# Altium PCB BOARD.PcbDoc
Units mm, origin at the board's own origin, x right, y up, seen from the top; angles counter-clockwise.
Board outline 30 x 20 mm, 2 copper layers (Top Layer, Bottom Layer), stack 1.18 mm thick; 35 components, 39 nets, 158 pads, 60 vias.
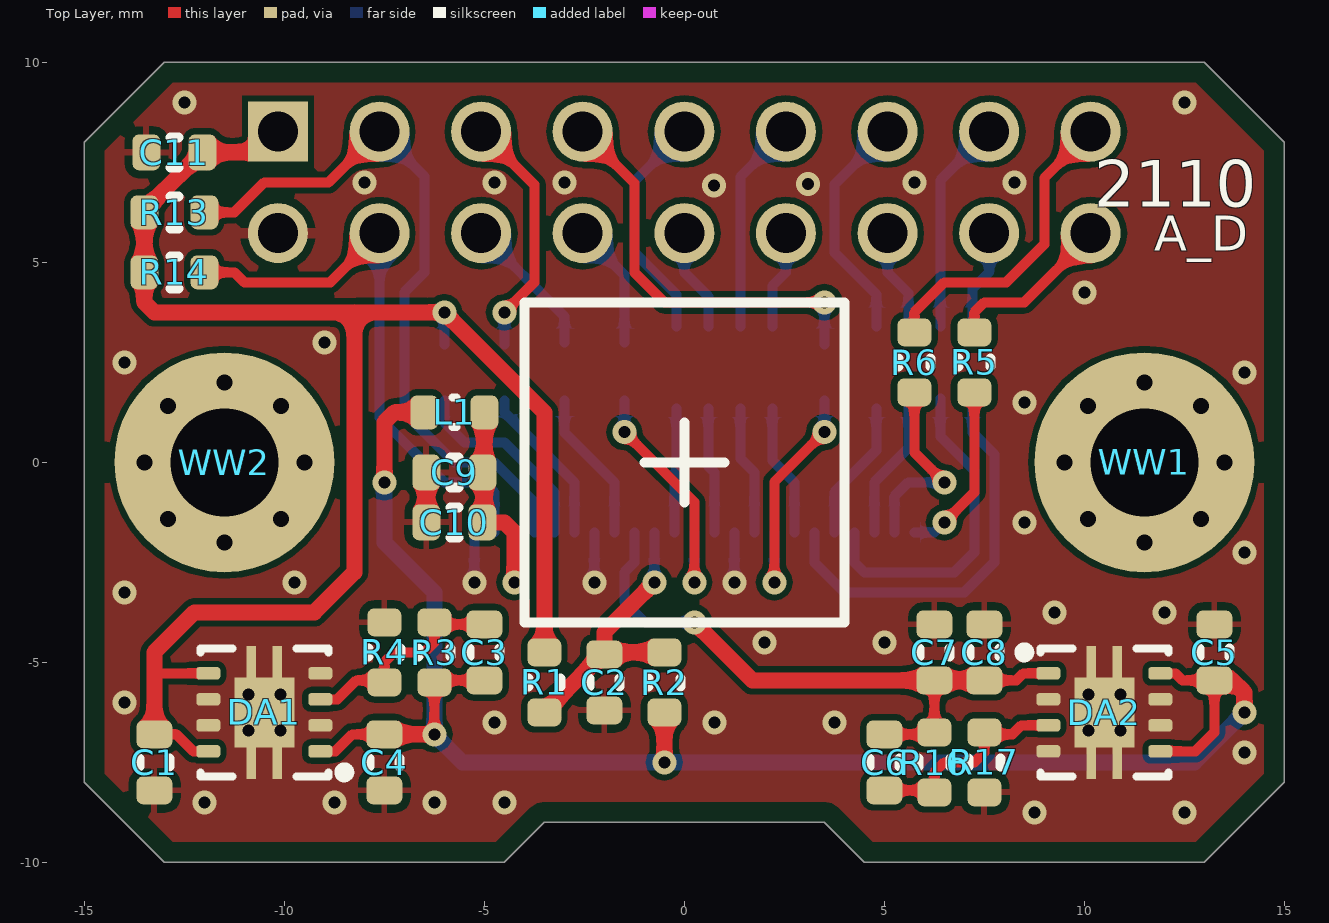
[diagram p0: Top Layer view]
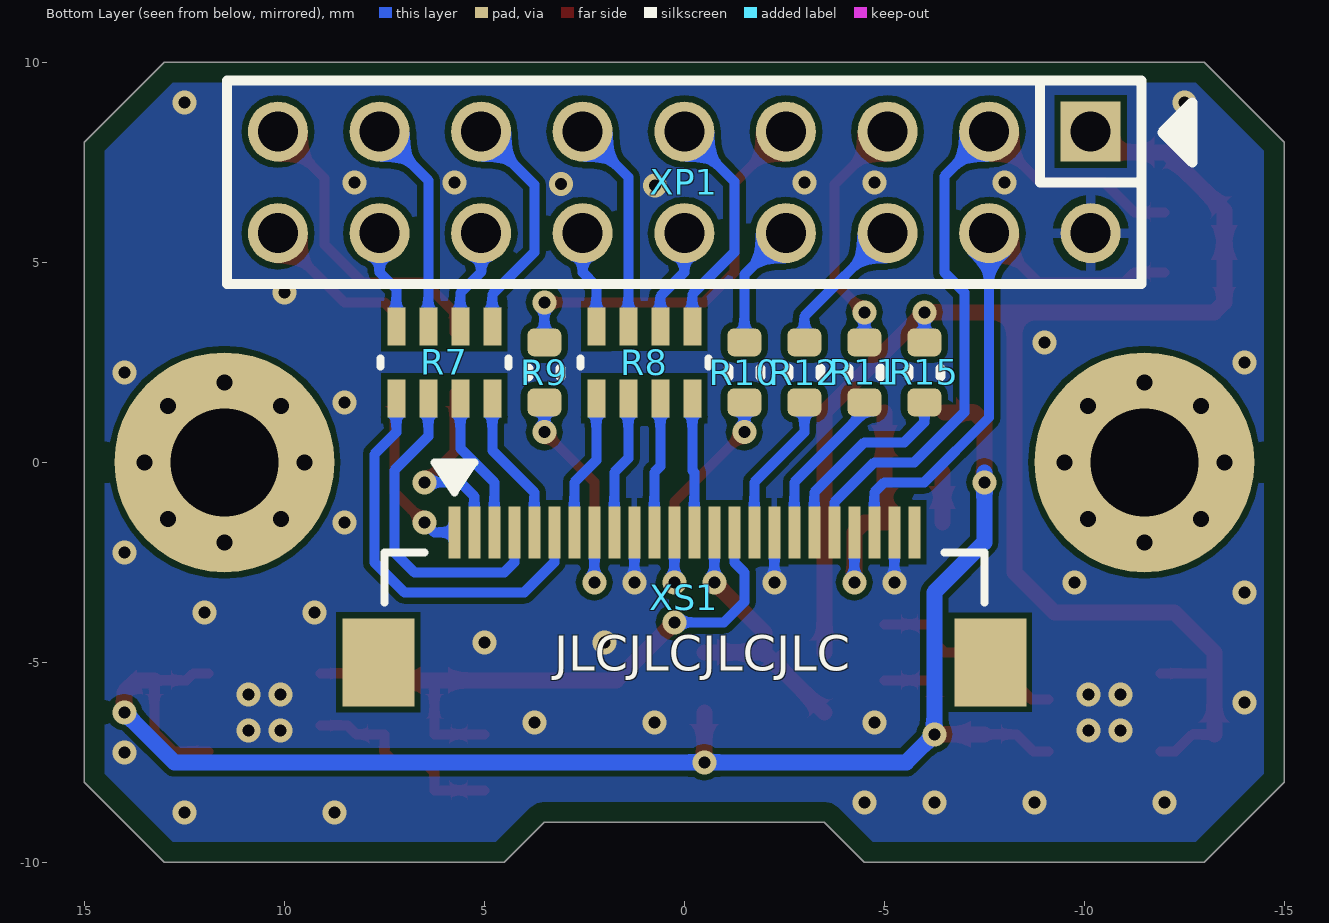
[diagram p1: Bottom Layer view, seen from below]

## Layer stack, top to bottom
Top Solder: solder mask 0.01, Solder Resist, Dk 3.5
Top Layer: signal copper 0.03
Dielectric1: core 1.12, FR-4, Dk 4.2
Bottom Layer: signal copper 0.03
Bottom Solder: solder mask 0.01, Solder Resist, Dk 3.5

## Board outline
-15,-8 -13,-10 -4.5,-10 -3.5,-9 3.5,-9 4.5,-10 13,-10 15,-8 15,8 13,10 -13,10 -15,8

## Design rules (kind name [scope] priority, off if disabled: settings)
BoardOutlineClearance [All] p1: gap=0.5 ignorepadtopadclearanceinfootprint=FALSE
Clearance [All] p1: gap=0.152 ignorepadtopadclearanceinfootprint=FALSE
ComponentClearance [All] p1 off: gap=0.25 collisioncheckmode=3 verticalgap=0.25 showdistances=FALSE
DiffPairsRouting [All] p1: maxlimit=0.4 minlimit=0.15 mostfreqgap=0.25 toplayer_minwidth=0.2 toplayer_maxwidth=0.4 toplayer_prefwidth=0.25 bottomlayer_minwidth=0.2 bottomlayer_maxwidth=0.4 bottomlayer_prefwidth=0.25 maxuncoupledlength=12
Height [All] p1: minheight=0 maxheight=25 prefheight=25
HoleSize [All] p1: absolutevalues=TRUE maxlimit=6 minlimit=0.3 maxpercent=80.000 minpercent=20.000
HoleToHoleClearance [All] p1: gap=0.25 allowstackedmicrovias=TRUE
MinimumSolderMaskSliver [All] p1 off: minsoldermaskwidth=0.254
PlaneClearance [All] p1: clearance=0.5
PlaneConnect [All] p1: planeconnectstyle=Relief reliefexpansion=0.5 reliefentries=4 reliefconductorwidth=0.25 reliefairgap=0.25
PolygonConnect PolygonConnect_DirectConnect [InComponentClass('DirectConnect')] p1: connectstyle=Direct reliefconductorwidth=0.254 reliefentries=4 polygonreliefangle="90 Angle" airgapwidth=0.254
PolygonConnect [All] p2: thpad.connectstyle=Relief thpad.reliefconductorwidth=0.25 thpad.reliefentries=4 thpad.polygonreliefangle="90 Angle" thpad.airgapwidth=0.2 smdpad.connectstyle=Relief smdpad.reliefconductorwidth=0.15 smdpad.reliefentries=4 smdpad.polygonreliefangle="90 Angle" smdpad.airgapwidth=0.2 via.connectstyle=Direct via.reliefconductorwidth=0.254 via.reliefentries=4 via.polygonreliefangle="90 Angle" via.airgapwidth=0.254
RoutingCorners [All] p1: cornerstyle=45-Degree minsetback=1.5 maxsetback=3.5
RoutingVias [All] p1: holewidth=0.6 width=1.2 viastyle="Through Hole" minholewidth=0.3 minwidth=0.6 maxholewidth=1 maxwidth=2
SMDEntry [All] p1: side=TRUE corner=TRUE anyangle=TRUE
SilkToSilkClearance [All] p1 off: silktosilkclearance=0.254
SilkToSolderMaskClearance [IsPad] p1 off: minsilkscreentomaskgap=0.254 clearancetoexposedcopper=TRUE
SolderMaskExpansion [All] p1: expansion=0.05 istentingtop=FALSE
Width [All] p1: maxlimit=8 minlimit=0.2 preferedwidth=0.6
Width Width_TrackEnds [All] p2 off: maxlimit=0.25 minlimit=0.25 preferedwidth=0.25 checkconnectedcopper=TRUE
19 further rules are at their usual default settings.

## Classes and differential pairs
component class DirectConnect: DA1 DA2

## Components (designator, comment, footprint, x,y, rotation, side; value= is the part's Value field where it differs from the comment)
C1 "Capacitor" C0603_160X080H080_H -13.25,-7.5 r90 top value=1uF
C2 "Capacitor" C0603_160X080H080_H -2,-5.5 r90 top value=1uF
C3 "Capacitor" C0603_160X080H080_H -5,-4.75 r270 top value=27pF
C4 "Capacitor" C0603_160X080H080_H -7.5,-7.5 r90 top value=10uF
C5 "Capacitor" C0603_160X080H080_H 13.25,-4.75 r270 top value=1uF
C6 "Capacitor" C0603_160X080H080_H 5,-7.5 r90 top value=27pF
C7 "Capacitor" C0603_160X080H080_H 6.25,-4.75 r270 top value=10uF
C8 "Capacitor" C0603_160X080H080_H 7.5,-4.75 r270 top value=0.1uF
C9 "Capacitor" C0603_160X080H080_H -5.75,-0.25 r0 top value=1uF
C10 "Capacitor" C0603_160X080H080_H -5.75,-1.5 r0 top value=0.1uF
C11 "Capacitor" C0603_160X080H080_H -12.75,7.75 r0 top value=10uF
DA1 "TPS73501DRB" VSON-8_065P300X300X100_N -10.5,-6.25 r90 top value=TPS73501DRBR
DA2 "TPS73501DRB" VSON-8_065P300X300X100_N 10.5,-6.25 r270 top value=TPS73501DRBR
L1 "FerriteBead" L0603_160X080H080_H -5.75,1.25 r0 top value=BLM18PG221SH1D
R1 "Resistor" R0603_160X080H045_H -3.5,-5.5 r90 top value=0
R2 "Resistor" R0603_160X080H045_H -0.5,-5.5 r270 top value=0
R3 "Resistor" R0603_160X080H045_H -6.25,-4.75 r90 top value=27k
R4 "Resistor" R0603_160X080H045_H -7.5,-4.75 r270 top value=20k
R5 "Resistor" R0603_160X080H045_H 7.25,2.5 r90 top value=51
R6 "Resistor" R0603_160X080H045_H 5.75,2.5 r90 top value=51
R7 "Resistor-4" CAT16-x4 6,2.5 r180 bottom value=51
R8 "Resistor-4" CAT16-x4 1,2.5 r180 bottom value=51
R9 "Resistor" R0603_160X080H045_H 3.5,2.25 r90 bottom value=51
R10 "Resistor" R0603_160X080H045_H -1.5,2.25 r90 bottom value=51
R11 "Resistor" R0603_160X080H045_H -4.5,2.25 r90 bottom value=51
R12 "Resistor" R0603_160X080H045_H -3,2.25 r90 bottom value=51
R13 "Resistor" R0603_160X080H045_H -12.75,6.25 r180 top value=4.7k
R14 "Resistor" R0603_160X080H045_H -12.75,4.75 r180 top value=4.7k
R15 "Resistor" R0603_160X080H045_H -6,2.25 r90 bottom value=4.7k
R16 "Resistor" R0603_160X080H045_H 6.25,-7.5 r90 top value=27k
R17 "Resistor" R0603_160X080H045_H 7.5,-7.5 r90 top value=360k
WW1 "NoBody" MH_M2.5 11.5,0 r180 top locked value=MOUNTINGHOLE
WW2 "NoBody" MH_M2.5 -11.5,0 r180 top locked value=MOUNTINGHOLE
XP1 "Text" PLD-18 0,7 r0 bottom locked value=PLD-18
XS1 "OV7670" FH12-24S-0.5SH 0,-5 r180 bottom locked value=FH12-24S-0.5SH(55)

## Footprints (in the part's own frame and the unit in brackets; to place one, negate y for a bottom-side part, rotate by r counter-clockwise, add the part's x,y. Pads: shape width x height; smd on the part's side, far side on the other; paste and mask are expansions set on the pad)
C0603_160X080H080_H [mm] "Chip Capacitor, 2-Leads, Body 1,60x0,80mm, IPC High Density"
  rrect50% 0.7x0.9 smd: 1(-0.7,0) 2(0.7,0)
  silkscreen extent -0.1,-0.38 0.1,0.38, body extent -0.8,-0.4 0.8,0.4, height 0.8
CAT16-x4 [mm] "Chip Array, Concave, 8-Leads, Pitch 0,80mm,  Body 3,20x1,60mm,  IPC Medium Density"
  rect 0.45x0.95 smd: 1(-1.2,-0.9) 2(-0.4,-0.9) 3(0.4,-0.9) 4(1.2,-0.9) 5(1.2,0.9) 6(0.4,0.9) 7(-0.4,0.9) 8(-1.2,0.9)
  silkscreen extent -1.6,-0.1 1.6,0.1, body extent -1.7,-0.95 1.7,0.95, height 0.6
FH12-24S-0.5SH [mm]
  rect 1.8x2.2 smd mask+0.025: 0(-7.65,0) 0(7.65,0)
  rect 0.3x1.3 smd mask+0.025: 1(-5.75,3.25) 2(-5.25,3.25) 3(-4.75,3.25) 4(-4.25,3.25) 5(-3.75,3.25) 6(-3.25,3.25) 7(-2.75,3.25) 8(-2.25,3.25) 9(-1.75,3.25) 10(-1.25,3.25) 11(-0.75,3.25) 12(-0.25,3.25) 13(0.25,3.25) 14(0.75,3.25) 15(1.25,3.25) 16(1.75,3.25) 17(2.25,3.25) 18(2.75,3.25) 19(3.25,3.25) 20(3.75,3.25) 21(4.25,3.25) 22(4.75,3.25) 23(5.25,3.25) 24(5.75,3.25)
  silkscreen extent -7.5,1.5 7.5,5, body extent -8.05,-2.9 8.05,3.5, height 2.09
L0603_160X080H080_H [mm] "Chip Inductor, 2-Leads, Body 1,60x0,80mm, IPC High Density"
  rrect50% 0.7x0.85 smd: 1(-0.75,0) 2(0.75,0)
  silkscreen extent -0.05,-0.37 0.05,0.37, body extent -0.8,-0.4 0.8,0.4, height 0.8
MH_M2.5 [mm] "Mounting hole M2,5"
  round 0.4 hole 0.4 paste-10: MH(-2,0) MH(-1.414,1.414) MH(-1.414,-1.414) MH(0,2) MH(0,-2) MH(1.414,1.414) MH(1.414,-1.414) MH(2,0)
  round 5.5 hole 2.7 paste-10: MH(0,0)
PLD-18 [mm]
  rect 1.5x1.5 hole 1: 1(-10.16,-1.27)
  round 1.5 hole 1: 2(-10.16,1.27) 3(-7.62,-1.27) 4(-7.62,1.27) 5(-5.08,-1.27) 6(-5.08,1.27) 7(-2.54,-1.27) 8(-2.54,1.27) 9(0,-1.27) 10(0,1.27) 11(2.54,-1.27) 12(2.54,1.27) 13(5.08,-1.27) 14(5.08,1.27) 15(7.62,-1.27) 16(7.62,1.27) 17(10.16,-1.27) 18(10.16,1.27)
  silkscreen extent -11.43,-2.54 11.43,2.54, body extent -11.43,-2.54 11.43,2.54, height 8.9
R0603_160X080H045_H [mm] "Chip Resistor, 2-Leads, Body 1,60x0,80mm, IPC High Density"
  rrect50% 0.7x0.85 smd: 1(-0.75,0) 2(0.75,0)
  silkscreen extent -0.1,-0.4 0.1,0.4, body extent -0.8,-0.4 0.8,0.4, height 0.45
VSON-8_065P300X300X100_N [mm]
  rrect50% 0.31x0.6 smd: 1(-0.975,-1.4) 2(-0.325,-1.4) 3(0.325,-1.4) 4(0.975,-1.4) 5(0.975,1.4) 6(0.325,1.4) 7(-0.325,1.4) 8(-0.975,1.4)
  rect 0.825x0.23 smd: TP(-1.25,-0.325) TP(-1.25,0.325) TP(1.25,-0.325) TP(1.25,0.325)
  rect 1.75x1.5 smd: TP(0,0)
  silkscreen extent -1.62,-2.13 1.6,1.6, body extent -1.52,-1.52 1.52,1.52, height 1.04

## Part data
C1 C2 C5 C9: library part GCM188R71E105KA64D, Dielectric Type=X7R, Manufacturer=Murata, Schematic Value="1uF, 25V, X7R", Tolerance=±10%, Voltage=25V, Working Temperature Max=+125°С, Working Temperature Min=-55°С, Application Category=1, Functional Analog=GCM188R71E105KA64J, ID=134, Part Number=GCM188R71E105KA64D, Published=18.05.2010, Publisher="Andrew Danich", Type=Конденсатор
C3 C6: library part GRM1885C1H270JA01D, Dielectric Type=NP0, Manufacturer=Murata, Schematic Value="27pF, 50V, NP0", Tolerance=±5%, Voltage=50V, Working Temperature Max=+125°С, Working Temperature Min=-55°С, Application Category=1, Functional Analog=GRM1885C1H270JA01J, ID=213, Part Number=GRM1885C1H270JA01D, Published=18.05.2010, Publisher="Andrew Danich", Type=Конденсатор
C4 C7 C11: library part GRM188R60J106ME47D, Dielectric Type=X5R, Manufacturer=Murata, Schematic Value="10uF, 6.3V, X5R", Tolerance=±20%, Voltage=6.3V, Working Temperature Max=+85°С, Working Temperature Min=-55°С, Application Category=1, Functional Analog=GRM188R60J106ME47J, ID=136, Part Number=GRM188R60J106ME47D, Published=18.05.2010, Publisher="Andrew Danich", Type=Конденсатор
C8 C10: library part GRM188R72A104KA35D, Dielectric Type=X7R, Manufacturer=Murata, Schematic Value="0.1uF, 100V, X7R", Tolerance=±10%, Voltage=100V, Working Temperature Max=+125°С, Working Temperature Min=-55°С, Application Category=1, Functional Analog=GRM188R72A104KA35J, ID=232, Part Number=GRM188R72A104KA35D, Published=18.05.2010, Publisher="Andrew Danich", Type=Конденсатор
DA1 DA2: library part TPS73501DRBR, Input Voltage=+2.2…5.5V, Manufacturer="Texas Instruments", Output Current=500mA, Output Voltage=+1.2…5.5V, Working Temperature Max=+125°С, Working Temperature Min=-40°С, Application Category=1, ClassName=DirectConnect, Functional Analog=TPS73501DRBT, ID=27, Part Number=TPS73501DRBR, Published=25.03.2019, Publisher="Andrew Danich", RMS Noise=13.2uV, Type=Микросхема
L1: library part BLM18PG221SH1D, DC Resistance=0.1ohm, Inductor Type=EMIFIL, Manufacturer=Murata, Rated Current=1.4A, Schematic Value="220ohm ±25%", Tolerance=±25%, Working Temperature Max=+125°С, Working Temperature Min=-55°С, Application Category=1, Functional Analog=BLM18PG221SH1B, ID=8, Impedance at 100Mhz=220ohm, Part Number=BLM18PG221SH1D, Published=14.11.2014, Publisher="Andrew Danich", Type=Дроссель
R1 R2: library part RC0603JR-070R, Limit Voltage=50V, Manufacturer=Yageo, Schematic Value="0 ±5%", Temperature Coefficient=100ppm, Tolerance=±5%, Total Power Dissipation=0.1W, Working Temperature Max=+155°С, Working Temperature Min=-55°С, Application Category=1, Functional Analog="RC0603FR-070RL, CR0603-J/-000E", ID=5, Part Number=RC0603JR-070R, Published=24.03.2010, Publisher="Andrew Danich", Series Type=Thick-Film, Type=Резистор
R3 R16: library part RC0603JR-0727KL, Limit Voltage=50V, Manufacturer=Yageo, Schematic Value="27k ±5%", Temperature Coefficient=100ppm, Tolerance=±5%, Total Power Dissipation=0.1W, Working Temperature Max=+155°С, Working Temperature Min=-55°С, Application Category=1, ID=38, Part Number=RC0603JR-0727KL, Published=24.03.2010, Publisher="Andrew Danich", Series Type=Thick-Film, Type=Резистор
R4: library part RC0603FR-0720KL, Limit Voltage=50V, Manufacturer=Yageo, Schematic Value="20k ±1%", Temperature Coefficient=100ppm, Tolerance=±1%, Total Power Dissipation=0.1W, Working Temperature Max=+155°С, Working Temperature Min=-55°С, Application Category=1, ID=259, Part Number=RC0603FR-0720KL, Published=24.03.2010, Publisher="Andrew Danich", Series Type=Thick-Film, Type=Резистор
R5 R6 R9 R10 R11 R12: library part RC0603JR-0751RL, Limit Voltage=50V, Manufacturer=Yageo, Schematic Value="51 ±5%", Temperature Coefficient=100ppm, Tolerance=±5%, Total Power Dissipation=0.1W, Working Temperature Max=+155°С, Working Temperature Min=-55°С, Application Category=1, Functional Analog=CR0603-JW-510E, ID=314, Part Number=RC0603JR-0751RL, Published=24.03.2010, Publisher="Andrew Danich", Series Type=Thick-Film, Type=Резистор
R7 R8: library part CAT16-510J4LF, Limit Voltage=50V, Manufacturer=Bourns, Schematic Value="51 ±5%", Temperature Coefficient=200ppm, Tolerance=±5%, Total Power Dissipation=0,062W, Working Temperature Max=+125°С, Working Temperature Min=-55°С, Application Category=1, Functional Analog=TC164-JR-0751RL, ID=21, Part Number=CAT16-510J4LF, Published=15.07.2014, Publisher="Andrew Danich", Series Type=Thick-Film, Type="Набор резисторов"
R13 R14 R15: library part RC0603JR-074K7L, Limit Voltage=50V, Manufacturer=Yageo, Schematic Value="4.7k ±5%", Temperature Coefficient=100ppm, Tolerance=±5%, Total Power Dissipation=0.1W, Working Temperature Max=+155°С, Working Temperature Min=-55°С, Application Category=1, ID=56, Part Number=RC0603JR-074K7L, Published=24.03.2010, Publisher="Andrew Danich", Series Type=Thick-Film, Type=Резистор
R17: library part RC0603JR-07360KL, Limit Voltage=50V, Manufacturer=Yageo, Schematic Value="360k ±5%", Temperature Coefficient=100ppm, Tolerance=±5%, Total Power Dissipation=0.1W, Working Temperature Max=+155°С, Working Temperature Min=-55°С, Application Category=1, ID=48, Part Number=RC0603JR-07360KL, Published=24.03.2010, Publisher="Andrew Danich", Series Type=Thick-Film, Type=Резистор
WW1 WW2: library part MOUNTINGHOLE, ID=1, Part Number=MOUNTINGHOLE, Published=24.03.2015, Publisher="Andrew Danich", Type=Лепесток
XP1: library part PLD-18, Limit Current=3A, Limit Voltage=250V, Resistance=15momh, Application Category=1, Connector Type=Male, ID=121, Part Number=PLD-18, Pins=18, Pitch=2.54mm, Published=03.09.2018, Publisher="Andrew Danich", Surface Finish=Gold, Type=Вилка
XS1: library part FH12-24S-0.5SH(55), Limit Current=500mA, Limit Voltage=50V, Manufacturer="Hirose Connector", Application Category=1, Connector Type=Female, ID=4, Part Number=FH12-24S-0.5SH(55), Pins=24, Pitch=0.5mm, Published=09.02.2019, Publisher="Andrew Danich", Series=FFC, Type=Розетка

## Via types
v1: diameter 0.6, hole 0.3, Top Layer to Bottom Layer, tented both sides, 52 vias
v2: diameter 0.6, hole 0.3, Top Layer to Bottom Layer, 8 vias

## Nets (pads, with @x,y where several pads share a name; then routed paths per layer and width w, separated by ;. In a path a pad name is that pad's centre, name@x,y a point inside that pad or via, vN(x,y) a via of type N, cw(c..) or ccw(c..) an arc to the next point about the centre after c; other vN are vias at no path point)
AVCC2P8: C9.2 C10.2 L1.2 XS1.21 | length 6.2
  Top Layer w0.4: L1.2 -5,-1.45 C10.2 -4.5,-1.5 -4.25,-1.75 v1(-4.25,-3)
  Bottom Layer w0.25: v1(-4.25,-3) XS1.21
DATA0: R5.2 XP1.18 | length 4.3
  Top Layer w0.25: R5.2 7.25,3.75 7.5,4 8.5,4 10.16,5.66 XP1.18
DATA1: R6.2 XP1.17 | length 7.8
  Top Layer w0.25: R6.2 5.75,3.75 6.5,4.5 8.05,4.5 9,5.45 9,7.11 XP1.17
DATA2: R7.8 XP1.16 | length 2.5
  Bottom Layer w0.25: R7.8 7.2,4.33 7.62,4.75 XP1.16
DATA3: R7.7 XP1.15 | length 5.4
  Bottom Layer w0.25: R7.7 6.4,7.05 XP1.15
DATA4: R7.6 XP1.14 | length 2.5
  Bottom Layer w0.25: XP1.14 5.08,4.75 5.6,4.23 R7.6
DATA5: R7.5 XP1.13 | length 5.9
  Bottom Layer w0.25: R7.5 4.8,4.2 3.75,5.25 3.75,6.94 XP1.13
DATA6: R8.8 XP1.12 | length 2.5
  Bottom Layer w0.25: R8.8 2.2,4.41 2.54,4.75 XP1.12
DATA7: R8.7 XP1.11 | length 5.3
  Bottom Layer w0.25: R8.7 1.4,7.13 XP1.11
DATA8: R8.6 XP1.10 | length 2.6
  Bottom Layer w0.25: XP1.10 0,4.75 0.6,4.15 R8.6
DATA9: R8.5 XP1.9 | length 5.8
  Bottom Layer w0.25: R8.5 -0.2,4.2 -1.25,5.25 -1.25,7.02 XP1.9
GND: C1.1 C2.1 C4.1 C5.1 C7.1 C8.1 C9.1 C10.1 C11.1 DA1.2 DA1.4 DA1.6 DA1.7 DA1.TP DA2.2 DA2.4 DA2.6 DA2.7 DA2.TP R4.1 R17.1 XP1.2 XS1.10 XS1.17 XS1.23 | length 5
  Top Layer w0.4: C10.1 C9.1
  Bottom Layer w0.25: v1(-5.25,-3) XS1.23 ; v1(-2.25,-3) XS1.17 ; v1(1.25,-3) XS1.10
  other v1: 8.75,-8.75 12.5,-8.75 -12,-8.5 -8.75,-8.5 -6.25,-8.5 -4.5,-8.5 14,-7.25 -4.75,-6.5 0.75,-6.5 3.75,-6.5 -14,-6 2,-4.5 5,-4.5 9.25,-3.75 12,-3.75 -14,-3.25 -9.75,-3 14,-2.25 8.5,-1.5 8.5,1.5 14,2.25 -14,2.5 -9,3 10,4.25 0.737,6.919 3.087,6.956 -8,7 -4.75,7 -3,7 5.75,7 8.25,7 -12.5,9 12.5,9
  other v2: -10.9,-6.7 -10.1,-6.7 10.1,-6.7 10.9,-6.7 -10.9,-5.8 -10.1,-5.8 10.1,-5.8 10.9,-5.8
HREF: R12.2 XP1.6 | length 3.6
  Bottom Layer w0.25: XP1.6 -3,3.65 R12.2
NetC2_2: C2.2 R1.1 R2.1 XS1.14 | length 7.2
  Top Layer w0.4: R1.1 -2.05,-4.8 C2.2 ; v1(-0.75,-3) -2,-4.25 C2.2 ; R2.1 -1.95,-4.75 C2.2
  Bottom Layer w0.25: v1(-0.75,-3) XS1.14
NetC3_1: C3.1 DA1.3 R3.2 R4.2 | length 5.4
  Top Layer w0.25: DA1.3 -8.675,-5.925 -8.2,-5.45 -7.5,-5.45 -7.5,-5 -7.25,-4.75 -6.5,-4.75 -6.25,-4.5 -6.25,-4.05 C3.1
NetC6_1: C6.1 DA2.3 R16.1 R17.2 | length 5.3
  Top Layer w0.25: C6.1 6.25,-8.2 6.25,-7.75 6.5,-7.5 7.25,-7.5 7.5,-7.25 7.5,-6.8 8.2,-6.8 8.425,-6.575 DA2.3
NetR5_1: R5.1 XS1.1 | length 4.4
  Top Layer w0.25: v1(6.5,-1.5) 7.25,-0.75 R5.1
  Bottom Layer w0.25: XS1.1 6.25,-1.75 v1(6.5,-1.5)
NetR6_1: R6.1 XS1.2 | length 4.9
  Top Layer w0.25: R6.1 5.75,0.25 v1(6.5,-0.5)
  Bottom Layer w0.25: XS1.2 5.25,-0.85 5.6,-0.5 v1(6.5,-0.5)
NetR7_1: R7.1 XS1.6 | length 10.2
  Bottom Layer w0.25: XS1.6 3.25,-2.5 4,-3.25 7,-3.25 7.75,-2.5 7.75,0.2 7.2,0.75 R7.1
NetR7_2: R7.2 XS1.4 | length 8.3
  Bottom Layer w0.25: XS1.4 4.25,-2.5 4.5,-2.75 6.75,-2.75 7.25,-2.25 7.25,-0.2 6.4,0.65 R7.2
NetR7_3: R7.3 XS1.3 | length 3.5
  Bottom Layer w0.25: XS1.3 4.75,-0.5 5.6,0.35 R7.3@5.6,1.35
NetR7_4: R7.4 XS1.5 | length 3.5
  Bottom Layer w0.25: XS1.5 3.75,-0.75 4.8,0.3 R7.4@4.8,1.35
NetR8_1: R8.1 XS1.7 | length 3.3
  Bottom Layer w0.25: R8.1@2.2,1.35 2.2,0.05 2.75,-0.5 XS1.7
NetR8_2: R8.2 XS1.9 | length 3.2
  Bottom Layer w0.25: R8.2@1.4,1.35 1.4,0.1 1.75,-0.25 XS1.9
NetR8_3: R8.3 XS1.11 | length 3.2
  Bottom Layer w0.25: R8.3@0.6,1.35 0.6,-0.1 0.75,-0.25 XS1.11
NetR8_4: R8.4 XS1.13 | length 3.1
  Bottom Layer w0.25: XS1.13 -0.25,-0.25 -0.2,-0.2 R8.4@-0.2,1.35
NetR9_1: R9.1 XS1.8 | length 6.3
  Top Layer w0.25: v1(2.25,-3) 2.25,-0.495 v1(3.5,0.755)
  Bottom Layer w0.25: v1(2.25,-3) XS1.8 ; v1(3.5,0.755) R9.1@3.5,1.55
NetR10_1: R10.1 XS1.12 | length 6.5
  Top Layer w0.25: v1(-1.5,0.755) 0.25,-0.995 v1(0.25,-3)
  Bottom Layer w0.25: v1(-1.5,0.755) R10.1@-1.5,1.55 ; v1(0.25,-3) XS1.12
NetR11_1: R11.1 XS1.18 | length 4
  Bottom Layer w0.25: R11.1@-4.5,1.55 -4.5,1.25 -2.75,-0.5 XS1.18
NetR12_1: R12.1 XS1.16 | length 3.8
  Bottom Layer w0.25: R12.1@-3,1.55 -3,0.75 -1.75,-0.5 XS1.16
PCLK: R9.2 XP1.7 | length 10.2
  Top Layer w0.25: XP1.7 -1.25,6.98 -1.25,4.75 -0.5,4 v1(3.5,4)
  Bottom Layer w0.25: R9.2@3.5,2.95 v1(3.5,4)
RESET: R15.1 XS1.19 | length 5
  Bottom Layer w0.25: R15.1@-6,1.55 -6,1 -5.5,0.5 -4.5,0.5 -3.25,-0.75 XS1.19
SIO_CLK: R13.1 XP1.3 XS1.20 | length 17.8
  Top Layer w0.25: R13.1 -11.25,6.25 -10.5,7 -8.89,7 XP1.3
  Bottom Layer w0.25: XP1.3 -6.5,7.15 -6.5,4.75 -7,4.25 -7,1.25 -5.75,0 -4.75,0 -3.75,-1 XS1.20
SIO_DATA: R14.1 XP1.4 XS1.22 | length 14.2
  Top Layer w0.25: R14.1 -11.25,4.75 -11,4.5 -8.85,4.5 XP1.4
  Bottom Layer w0.25: XP1.4 -7.62,1.12 -6,-0.5 -5,-0.5 -4.75,-0.75 XS1.22
VCC2P8: C3.2 C4.2 C5.2 DA1.1 DA2.5 DA2.8 L1.1 R2.2 R3.1 | length 43.2
  Top Layer w0.25: DA1.1 -8.725,-7.225 -8.3,-6.8 C4.2 ; v1(-6.25,-6.8) -6.25,-5.45 C3.2 ; DA2.5 12.775,-7.225 13.25,-6.75 C5.2 12.45,-5.45 12.275,-5.275 DA2.8
  Top Layer w0.4: C4.2 v1(-6.25,-6.8) ; v1(-7.5,-0.5) -7.5,1 -7.25,1.25 L1.1 ; v1(-0.5,-7.5) R2.2 ; C5.2 13.7,-5.45 14,-5.75 v1(14,-6.25)
  Bottom Layer w0.4: v1@-7.5,-0.25 v1(-7.5,-0.5) -7.5,-2 -6.25,-3.25 v1(-6.25,-6.8) -5.55,-7.5 12.75,-7.5 v1(14,-6.25)
VCC3P3: C1.2 C11.2 DA1.5 DA1.8 R1.2 R13.2 R14.2 R15.2 XP1.1 | length 41.7
  Top Layer w0.25: C1.2 -12.7,-6.8 -12.275,-7.225 DA1.8 ; -13.25,-5.26 -13.235,-5.275 DA1.5
  Top Layer w0.4: C1.2 -13.25,-5.26 -13.25,-4.75 -12.25,-3.75 -9.25,-3.75 -8.25,-2.75 -8.25,3.75 ; XP1.1 -10.68,7.75 C11.2 -13.5,6.3 R13.2 R14.2 -13.5,4 -13.25,3.75 -8.25,3.75 ; R1.2 -3.5,1.25 v1(-6,3.75) -8.25,3.75
  Bottom Layer w0.25: R15.2@-6,2.95 R15.2 v1(-6,3.75)
VCC_CORE: C6.2 C7.2 C8.2 DA2.1 R16.2 XS1.15 | length 15.9
  Top Layer w0.25: C6.2 6.25,-6.8 C7.2 ; C8.2 8.3,-5.45 8.475,-5.275 DA2.1
  Top Layer w0.4: v1(0.25,-4) 1.7,-5.45 C7.2 C8.2
  Bottom Layer w0.25: XS1.15 -1.25,-2.5 -1.5,-2.75 -1.5,-3.489 -0.989,-4 v1(0.25,-4)
VSYNC: R11.2 XP1.5 | length 6.2
  Top Layer w0.25: XP1.5 -3.75,6.94 -3.75,4.5 v1(-4.5,3.75)
  Bottom Layer w0.25: R11.2@-4.5,2.95 R11.2 v1(-4.5,3.75)
XCLK: R10.2 XP1.8 | length 3.2
  Bottom Layer w0.25: XP1.8 -1.5,4.69 R10.2
pads on no net: WW1.MH WW2.MH XS1.0 XS1.24

## Polygon pours and split planes (outlines as drawn)
GND on Top Layer "GND_L01_P000" (solid, remove dead copper, pour order 0): -15,-10 -15,10 15,10 15,-10
GND on Bottom Layer "GND_L02_P002" (solid, remove dead copper, pour order 2): -15,10 15,10 15,-10 -15,-10

## Silkscreen, mask and mechanical layers (free items; w line width, h text height)
Top Overlay:
  lines w0.25: -1,0 1,0 ; 0,-1 0,1 ; -4,-4 4,-4 4,4 -4,4 -4,-4
  text "2110" at 10.25,6 h2
  text "A_D" at 11.75,5 h1.5
Bottom Overlay:
  region: -12.7,9 -12.7,7.5 -11.95,8.25
  lines w0.25: -12.7,7.5 -12.7,9 -11.95,8.25 ; -12.7,7.5 -12.7,7.5 ; -12.7,7.5 -11.95,8.25 ; -11.95,8.25 -11.95,8.25
  text "JLCJLCJLCJLC" at 3.25,-5.5 h1.5
1 - Board Outline:
  the board outline again, w0.25